# Altium PCB foot-switch_board.PcbDoc
Units mm, origin at the board's own origin, x right, y up, seen from the top; angles counter-clockwise.
Board outline 46 x 27 mm, 2 copper layers (Top Layer, Bottom Layer); 10 components, 9 nets, 31 pads, 4 vias.
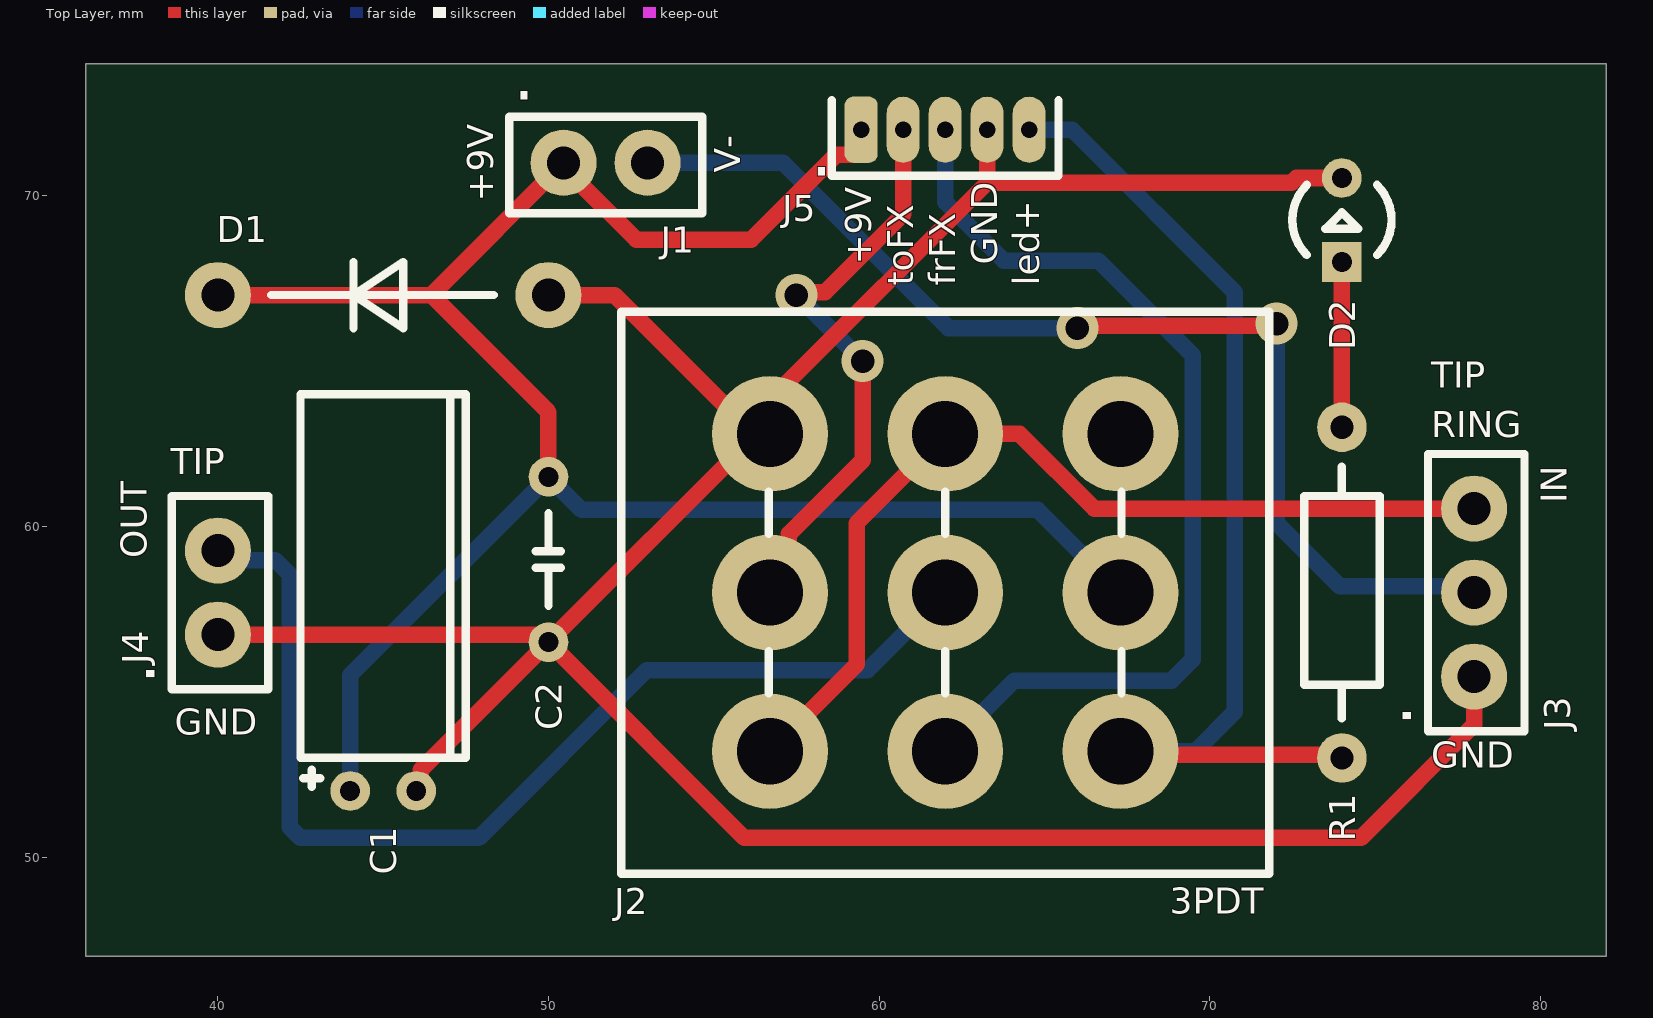
[diagram p0: Top Layer view]
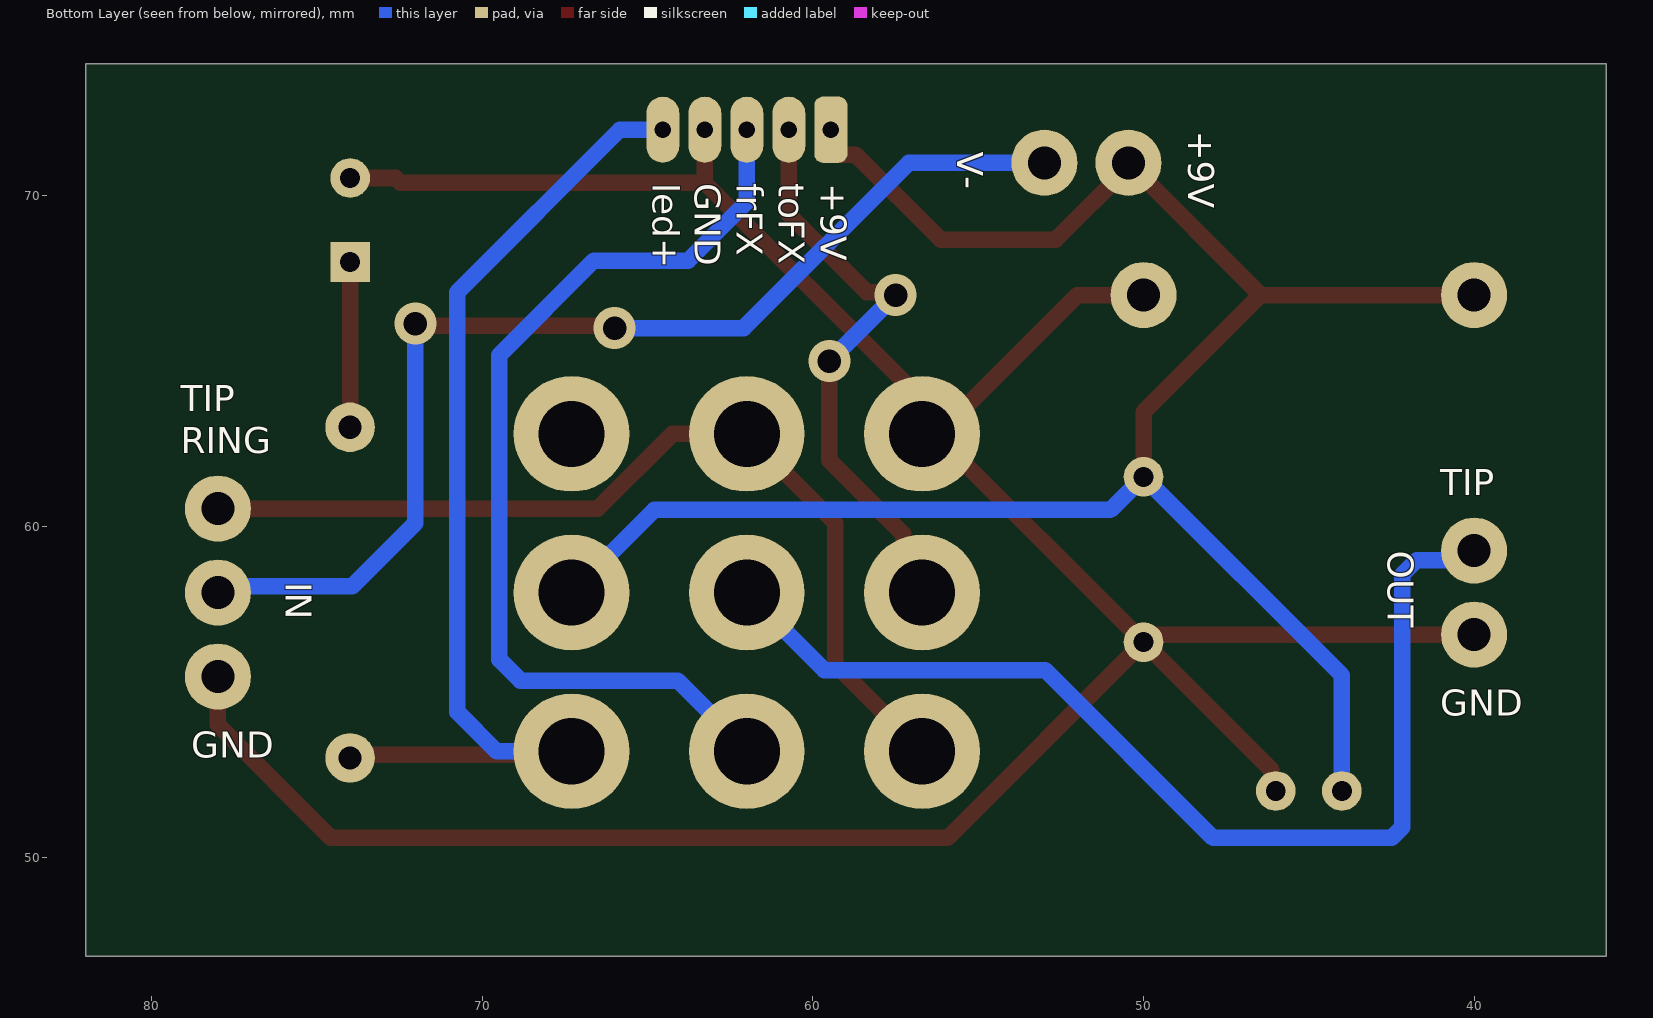
[diagram p1: Bottom Layer view, seen from below]
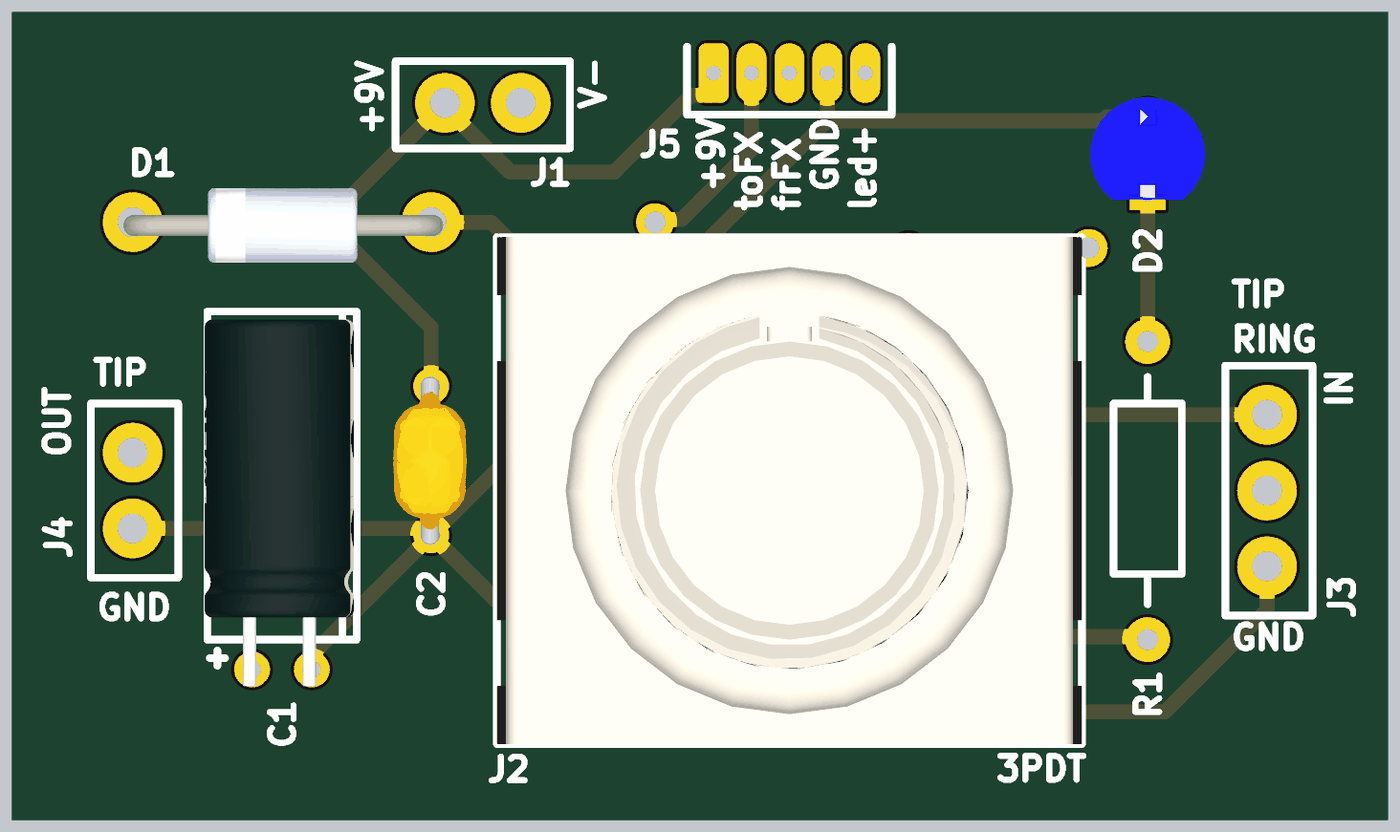
[diagram p2: 3D render of the assembled board from above, using the file's embedded part models]

## Layer stack, top to bottom
Top Solder: solder mask 0.0102, Solder Resist, Dk 3.5
Top Layer: signal copper 0.0356
Dielectric 1: dielectric 0.32, FR-4, Dk 4.8
Bottom Layer: signal copper 0.0356
Bottom Solder: solder mask 0.0102, Solder Resist, Dk 3.5

## Board outline
36,47 82,47 82,74 36,74

## Design rules (kind name [scope] priority, off if disabled: settings)
Clearance [All] p1: gap=0.254 ignorepadtopadclearanceinfootprint=FALSE except(0: Arc-Hole Track-Hole SMDPad-Hole THPad-Hole Via-Hole Fill-Hole Poly-Hole Region-Hole Text-Hole)
PolygonConnect [All] p1: connectstyle=Relief reliefconductorwidth=0.254 reliefentries=4 polygonreliefangle="90 Angle" airgapwidth=0.254
RoomDefinition foot-switch_board_01 [InComponentClass('foot-switch_board_01')] p1: confinementstyle=ConfineIn formatcopy=TRUE lockcomponents=FALSE outline 38,44 112,44 112,87 38,87
RoutingVias [All] p1: holewidth=0.711 width=1.27 viastyle="Through Hole" minholewidth=0.711 minwidth=1.27 maxholewidth=0.711 maxwidth=1.27
SolderMaskExpansion [All] p1: expansion=0.102 istentingtop=FALSE
Width [All] p1: maxlimit=1 minlimit=0.254 preferedwidth=0.5 minimp=50.000000 maximp=50.000000 favimp=50.000000
30 further rules are at their usual default settings.

## Components (designator, comment, footprint, x,y, rotation, side; value= is the part's Value field where it differs from the comment)
C1 "pol_cap_tht_2x5x11_flat" POL_CAP_2X5X11_0.5_RAD_FLAT 45,52 r0 top value=100u
C2 "cap_tht_5mm" CAP_5MM 50,59 r90 top value=100n
D1 "diode_tht_1n4007" DIODE_THT 45,67 r180 top
D2 "led_blue_tht_3mm" LED_3MM 74,69.27 r90 top value=blue
J1 "2 Pole 2.54mm" 2.54MM_2POLE 51.73,71 r0 top
J2 "SF17010F-0302-21R-L" SF17010F-0302-21R-L 62,58 r0 top
J3 "Audio Jack 6mm 3 pole contacts" 2.54MM_3POLE 78,58 r90 top
J4 "Audio Jack 6mm 2 pole contacts" 2.54MM_2POLE 40,58 r90 top
J5 "5 Pole Ribbon Connector" 1.27MM_5POLE_EDGE 62,72 r0 top
R1 "res_mcmf_series_tht_axial_P10mm" RES_P10MM_AXIAL 74,58 r90 top value=4k7

## Footprints (in the part's own frame and the unit in brackets; to place one, negate y for a bottom-side part, rotate by r counter-clockwise, add the part's x,y. Pads: shape width x height; smd on the part's side, far side on the other; paste and mask are expansions set on the pad)
1.27MM_5POLE_EDGE [mm]
  rrect50% 1x2 hole 0.5: 1(-2.54,0)
  oval 1x2 hole 0.5: 2(-1.27,0) 3(0,0) 4(1.27,0) 5(2.54,0)
  silkscreen extent -3.43,-1.4 3.43,0.89
2.54MM_2POLE [mm]
  round 2 hole 1: 1(-1.27,0) 2(1.27,0)
  silkscreen extent -2.92,-1.52 2.92,1.4
2.54MM_3POLE [mm]
  round 2 hole 1: 1(-2.54,0) 2(0,0) 3(2.54,0)
  silkscreen extent -4.19,-1.52 4.19,1.4
CAP_5MM [mm]
  round 1.2 hole 0.6: 1(-2.5,0) 2(2.5,0)
  silkscreen extent -1.4,-0.38 1.4,0.38, body extent -2.83,-1.19 2.83,1.27, height 5.5
DIODE_THT [mm]
  round 2 hole 1: 1(-5,0) 2(5,0)
  silkscreen extent -3.35,-1 3.38,1, body extent -5.4,-1.14 5.3,1.36, height 2.58
LED_3MM [mm]
  rect 1.2x1.2 hole 0.6: 1(-1.27,0)
  round 1.2 hole 0.6: 2(1.27,0)
  silkscreen extent -1.06,-1.5 1.06,1.5, body extent -1.52,-1.92 1.92,1.92, height 3.89
POL_CAP_2X5X11_0.5_RAD_FLAT [mm]
  round 1.2 hole 0.6: 1(-1,0) 2(1,0)
  silkscreen extent -2.5,0.13 2.5,12, body extent -2.59,-0.56 2.41,11.74, height 5
RES_P10MM_AXIAL [mm]
  round 1.5 hole 0.7: 1(-5,0) 2(5,0)
  silkscreen extent -3.81,-1.14 3.81,1.14, body extent -5.25,-1.25 5.25,1.26, height 2.63
SF17010F-0302-21R-L [mm] "Alpha 3PDT Footswitch"
  round 3.5 hole 2: 1(-5.3,-4.8) 2(0,-4.8) 3(5.3,-4.8) 4(-5.3,0) 5(0,0) 6(5.3,0) 7(-5.3,4.8) 8(0,4.8) 9(5.3,4.8)
  silkscreen extent -9.8,-8.5 9.8,8.5, body extent -9.8,-8.5 9.8,8.5, height 38.2

## Part data
C1: "Kondensatoranschlüsse: Radial bedrahtet / Anschlussabstand: 2mm / Produktdurchmesser: 5mm / Produkthöhe: 11mm / Anschlussdurchmesser: 0.5mm", ComponentLink1Description="Manufacturer Link", ComponentLink2Description="Supplier Link", ComponentLink2URL=https://at.farnell.com/w/c/passive-bauelemente/kondensatoren/aluminium-elektrolytkondensatoren/bedrahtete-aluminium-elektrolytkondensatoren?kapazitat=1uf|2.2uf|10uf|22uf|100uf&spannung-dc-=10v|16v|25v|35v|50v|63v|100v&kondensatoranschlusse=radial-bedrahtet&anschlussabstand=2mm&produktdurchmesser=5mm&produkthohe=11mm&anschlussdurchmesser=0.5mm&range=inc-in-stock|exc-delivery-surcharge|exc-obs, ComponentLink3Description="Datasheet Link", Supplier=Farnell
C2: "ceramic cap / Anschlussabstand: 5mm / 0.5mm lead diameter", ComponentLink1Description="Manufacturer Link", ComponentLink2Description="Supplier Link", ComponentLink2URL=https://at.farnell.com/w/c/passive-bauelemente/kondensatoren/keramikkondensatoren/keramik-vielschichtkondensatoren-mlcc-bedrahtet?anschlussabstand=5mm&range=inc-in-stock|exc-delivery-surcharge|exc-obs, ComponentLink3Description="Datasheet Link", Supplier=Farnell
D1: Manufacturer=onsemi, Manufacturer Part Number=1N4007RLG, Supplier Part Number=2317417, ComponentLink1Description="Manufacturer Link", ComponentLink2Description="Supplier Link", ComponentLink2URL=https://at.farnell.com/on-semiconductor/1n4007rlg/diode-std-erholzeit-1a-1kv-axial/dp/2317417, ComponentLink3Description="Datasheet Link", ComponentLink3URL=https://4donline.ihs.com/images/VipMasterIC/IC/ONSM/ONSM-S-A0013576855/ONSM-S-A0013902349-1.pdf?hkey=6D3A4C79FDBF58556ACFDE234799DDF0, Price=0.321, Supplier=Farnell
D2: "Durchlassstrom If: 20mA / Durchlassspannung: 3.7V", Manufacturer=Forge, Manufacturer Part Number=FNL-U300B22CDSL, Supplier Part Number=1200580, ComponentLink1Description="Supplier Link", ComponentLink1URL=https://at.farnell.com/forge/fnl-u300b22cdsl/led-3mm-blau/dp/1200580, ComponentLink2Description="Datasheet Link", ComponentLink2URL=https://www.farnell.com/datasheets/1508743.pdf, Price=0.784, Supplier=Farnell
J1: "Solder contacts for a 2.54mm connector"
J2: library part "Alpha 3PDT Footswitch PCB", "Alpha Footswitch 3PDT, PCB", Manufacturer=Alpha, Supplier Part Number=xsw24, ComponentLink1Description="Supplier Link", ComponentLink1URL=https://www.tube-town.net/ttstore/alpha-fussschalter-3-pol-wechsler-pcb.html, ComponentLink2Description="Manufacturer Link", ComponentLink2URL=http://www.taiwanalpha.com/en/products/8?cat=61#alpha_display, ComponentLink3Description="Datasheet Link", ComponentLink3URL=http://www.taiwanalpha.com/downloads?target=products&id=242, Manufacturer Part Number=SF17010F-0302-21R-L, Price=3.98, Supplier="Tube Town"
J3: "Solder contacts for a 6mm stereo audio jack"
J4: "Solder contacts for a 6mm mono audio jack"
J5: "Solder contacts for a 1.27mm ribbon cable"
R1: "metal oxide / Produktpalette: MCMF / Produktdurchmesser: 2.5mm / Produktlänge: 6.8mm", Manufacturer="Multicomp Pro", Manufacturer Part Number=MCMF006FF1002A50, Supplier Part Number=2401780, ComponentLink1Description="Supplier Link", ComponentLink1URL=https://at.farnell.com/w/c/passive-bauelemente/festwiderstande/widerstande-fur-durchsteckmontage?brand=multicomp-pro&produktpalette=mcmf&widerstandstechnologie=metallschichtwiderstand&produktlange=6.8mm&range=inc-in-stock|exc-delivery-surcharge|exc-obs, ComponentLink2Description="Datasheet Link", ComponentLink2URL=https://www.farnell.com/datasheets/2863892.pdf, Supplier=Farnell

## Via types
v1: diameter 1.27, hole 0.711, Top Layer to Bottom Layer, 4 vias

## Nets (pads, with @x,y where several pads share a name; then routed paths per layer and width w, separated by ;. In a path a pad name is that pad's centre, name@x,y a point inside that pad or via, vN(x,y) a via of type N, cw(c..) or ccw(c..) an arc to the next point about the centre after c; other vN are vias at no path point)
+9V: C1.1 C2.2 D1.2 J1.1 J2.6 J5.1 | length 61.5
  Top Layer w0.5: D1.2 46.46,67 ; C2.2 50,63.46 46.46,67 ; J5.1 59.46,71.5 59.21,71.25 58.71,71.25 56.135,68.675 52.657,68.675 50.46,70.872 J1.1 46.46,67
  Bottom Layer w0.5: C1.1 44,55.5 C2.2 51,60.5 64.8,60.5 J2.6
GND: C1.2 C2.1 D1.1 D2.2 J2.7 J3.1 J4.1 J5.4 | length 89.5
  Top Layer w0.5: J4.1 49.581,56.73 49.811,56.5 C2.1 ; C1.2 46.134,52.134 46.134,52.634 C2.1 ; D1.1 52,67 J2.7@56.2,62.8 ; J5.4 63.27,70.398 ; D2.2 72.62,70.54 72.478,70.398 63.27,70.398 ; J3.1 78,54 74.578,50.578 55.922,50.578 C2.1 ; C2.1 56.3,62.8 J2.7 57.083,63.183 57.083,64.21 63.27,70.398
NetD2_1: D2.1 R1.2 | length 5
  Top Layer w0.5: R1.2 D2.1
NetJ1_2: J1.2 J3.2 | length 34
  Top Layer w0.5: v1(66,66) 66.068,66.068 71.957,66.068 v1(72.025,66.135)
  Bottom Layer w0.5: J1.2 57.099,71 62.099,66 v1(66,66) ; v1(72.025,66.135) 72.025,60.103 73.93,58.198 77.802,58.198 J3.2
NetJ2_1: J2.1 J2.8 J3.3 | length 28.7
  Top Layer w0.5: J2.1 59.325,55.825 59.325,60.103 62,62.778 J2.8 64.247,62.8 66.507,60.54 J3.3
NetJ2_2: J2.2 J5.3 | length 29.5
  Bottom Layer w0.5: J2.2 62,53.253 64.087,55.34 68.85,55.34 69.485,55.975 69.485,65.183 66.627,68.04 63.77,68.04 62,69.81 J5.3
NetJ2_3: J2.3 J5.5 R1.1 | length 31.7
  Top Layer w0.5: J2.3 67.4,53.1 73.9,53.1 R1.1
  Bottom Layer w0.5: J5.5 65.843,72 70.755,67.088 70.755,54.388 69.567,53.2 J2.3
NetJ2_4: J2.4 J5.2 | length 17.8
  Top Layer w0.5: J2.4 57.274,58.574 57.274,59.774 59.5,62 v1(59.5,65) ; v1(57.5,67) 57.587,67.087 58.372,67.087 60.73,69.445 J5.2
  Bottom Layer w0.5: v1(57.5,67) v1(59.5,65)
NetJ2_5: J2.5 J4.2 | length 33.2
  Bottom Layer w0.5: J4.2 40.287,58.983 41.737,58.983 42.18,58.54 42.18,50.895 42.497,50.578 47.895,50.578 52.975,55.658 59.658,55.658 J2.5
pads on no net: J2.9

## Silkscreen, mask and mechanical layers (free items; w line width, h text height)
Top Overlay:
  text "V-" at 55.8,70.7 h0.8 r90
  text "+9V" at 48.33,69.828 h0.8 r90
  text "+9V" at 59.76,67.923 h0.8 r90
  text "GND" at 63.57,67.923 h0.8 r90
  text "toFX" at 61.03,67.288 h0.8 r90
  text "frFX" at 62.3,67.288 h0.8 r90
  text "led+" at 64.84,67.288 h0.8 r90
  text "TIP" at 76.7,64.2 h0.8
  text "RING" at 76.7,62.7 h0.8
  text "TIP" at 38.57,61.573 h0.8
  text "IN" at 80.8,60.7 h0.8 r90
  text "OUT" at 37.852,59.033 h0.8 r90
  text "GND" at 38.7,53.7 h0.8
  text "GND" at 76.7,52.7 h0.8
Bottom Overlay:
  text "+9V" at 48.647,71.968 h0.8 r90
  text "V-" at 55.632,71.333 h0.8 r90
  text "+9V" at 59.76,70.38 h0.8 r90
  text "toFX" at 61.03,70.38 h0.8 r90
  text "frFX" at 62.3,70.38 h0.8 r90
  text "GND" at 63.57,70.38 h0.8 r90
  text "led+" at 64.84,70.38 h0.8 r90
  text "TIP" at 79.127,63.478 h0.8
  text "RING" at 79.127,62.208 h0.8
  text "TIP" at 41.027,60.938 h0.8
  text "OUT" at 42.615,59.268 h0.8 r90
  text "IN" at 75.952,58.315 h0.8 r90
  text "GND" at 41.027,54.27 h0.8
  text "GND" at 78.81,53 h0.8
Outline:
  the board outline again, w0

## Text inside footprints (layer, text, board x,y; h text height)
J2: Top Overlay "3PDT" at 68.786,48.292 h0.8